# Altium PCB BRK7360.PcbDoc (part 3 of 3)
Units mil, origin at the board's own origin, x right, y up, seen from the top; angles counter-clockwise.
Board outline 7086.61 x 3956.69 mil, 4 copper layers (L1-Top, L2-Plane-1, L3-Plane-2, L4-Bottom), stack 61.722 mil thick; 4 components, 249 nets, 395 pads, 441 vias.
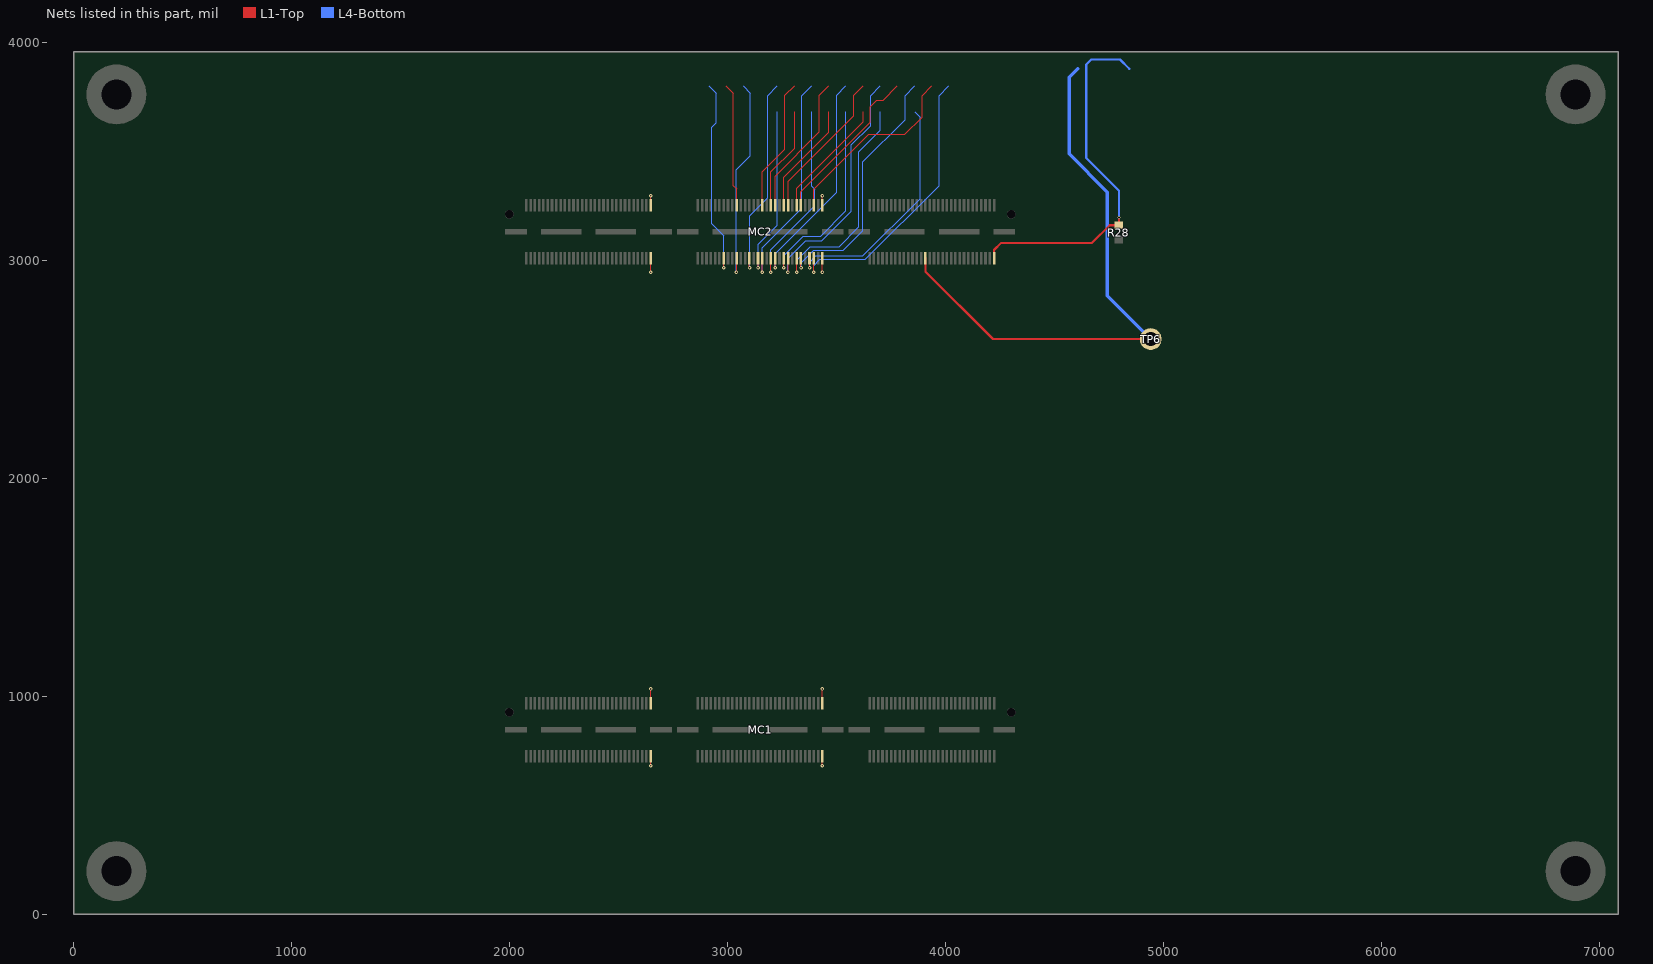
[diagram p5: the nets of this part, all layers, seen from the top]

## Via types
v1: diameter 16, hole 8, L1-Top to L4-Bottom, tented both sides, 441 vias

## Nets (pads, with @x,y where several pads share a name; then routed paths per layer and width w, separated by ;. In a path a pad name is that pad's centre, name@x,y a point inside that pad or via, vN(x,y) a via of type N, cw(c..) or ccw(c..) an arc to the next point about the centre after c; other vN are vias at no path point) (continued)
MC2_B32_P5: MC2.74 | length 923.2
  L1-Top w5: MC2.74@2982.28,3008.27 2982.28,2965.72 v1(2983,2965)
  L4-Bottom w5: 2913.39,3799.21 2948,3764.6 2948,3629 2928,3609 2928,3165.86 2983,3110.86 v1(2983,2965)
MC2_B32_P6: MC2.79 | length 568
  L1-Top w5: 2992.13,3799.21 3026,3765.34 3026,3342 3041.34,3326.66 MC2.79@3041.34,3251.58
MC2_B32_P7: MC2.80 | length 960.3
  L1-Top w5: v1(3041,2944) 3041.34,2944.34 MC2.80@3041.34,3008.27
  L4-Bottom w5: v1(3041,2944) 3041,3415 3105,3479 3105,3765.08 3070.87,3799.21
MC2_B32_P8: MC2.86 | length 930.5
  L1-Top w5: MC2.86@3100.39,3008.27 3100.39,2965.61 v1(3101,2965)
  L4-Bottom w5: v1(3101,2965) 3101,3204 3184,3287 3184,3754.87 3228.35,3799.21
MC2_B32_P9: MC2.91 | length 608.8
  L1-Top w5: MC2.91@3159.45,3251.58 3159.45,3405.45 3263,3509 3263,3755.13 3307.09,3799.21
MC2_B32_P10: MC2.92 | length 1013.6
  L1-Top w5: v1(3159,2944) 3159.45,2944.45 MC2.92@3159.45,3008.27
  L4-Bottom w5: v1(3159,2944) 3159,3056.14 3341,3238.14 3341,3754.39 3385.83,3799.21
MC2_B32_P11: MC2.97 | length 649.6
  L1-Top w5: MC2.97@3218.5,3251.58 3218.5,3385.5 3421,3588 3421,3755.65 3464.57,3799.21
MC2_B32_P12: MC2.98 | length 1012
  L1-Top w5: MC2.98@3218.5,3008.27 3218.5,2965.5 v1(3219,2965)
  L4-Bottom w5: v1(3219,2965) 3219,3030.14 3500,3311.14 3500,3755.91 3543.31,3799.21
MC2_B32_P13: MC2.103 | length 690.3
  L1-Top w5: MC2.103@3277.56,3251.58 3277.56,3362.56 3578,3663 3578,3755.17 3622.05,3799.21
MC2_B32_P14: MC2.104 | length 1138.6
  L1-Top w5: v1(3277,2944) 3277.56,2944.56 MC2.104@3277.56,3008.27
  L4-Bottom w5: v1(3277,2944) 3277,3007.14 3358.86,3089 3432.86,3089 3568,3224.14 3568,3529.14 3656,3617.14 3656,3754.43 3700.79,3799.21
MC2_B32_P15: MC2.109 | length 747.7
  L1-Top w5: MC2.109@3336.61,3251.58 3336.61,3314.61 3655.14,3633.14 3655.14,3703.14 3685,3733 3713.31,3733 3779.53,3799.21
MC2_B32_P16: MC2.110 | length 1173.2
  L1-Top w5: MC2.110@3336.61,3008.27 3336.61,2965.39 v1(3337,2965)
  L4-Bottom w5: v1(3337,2965) 3337,2988.14 3394.86,3046 3530.86,3046 3620,3135.14 3620,3450 3814,3644 3814,3754.94 3858.27,3799.21
MC2_B32_P17: MC2.115 | length 868.5
  L1-Top w5: MC2.115@3395.67,3251.58 3395.67,3324.81 3647.86,3577 3812.86,3577 3892,3656.14 3892,3754.2 3937.01,3799.21
MC2_B32_P18: MC2.116 | length 1298.6
  L1-Top w5: v1(3395,2944) 3395.67,2944.67 MC2.116@3395.67,3008.27
  L4-Bottom w5: v1(3395,2944) 3395,2974 3424,3003 3631.86,3003 3971,3342.14 3971,3754.46 4015.75,3799.21
MC2_B32_X0: MC2.108 | length 1037.7
  L1-Top w5: MC2.108@3316.93,3008.27 3316.93,2944.07 v1(3317,2944)
  L4-Bottom w5: v1(3317,2944) 3317,2999 3380,3062 3512,3062 3602,3152 3602,3497 3700.79,3595.79 3700.79,3681.1
MC2_B32_X1: MC2.107 | length 555.9
  L1-Top w5: MC2.107@3316.93,3251.58 3316.93,3329.93 3622.05,3635.05 3622.05,3681.1
MC2_B32_X2: MC2.102 | length 925
  L1-Top w5: MC2.102@3257.87,3008.27 3257.87,2965.13 v1(3258,2965)
  L4-Bottom w5: v1(3258,2965) 3258,3021 3347,3110 3428,3110 3543.31,3225.31 3543.31,3681.1
MC2_B32_X3: MC2.101 | length 515.1
  L1-Top w5: MC2.101@3257.87,3251.58 3257.87,3380.87 3464.57,3587.57 3464.57,3681.1
MC2_B32_X4: MC2.96 | length 891.3
  L1-Top w5: v1(3198,2944) 3198.82,2944.82 MC2.96@3198.82,3008.27
  L4-Bottom w5: v1(3198,2944) 3198,3048 3400,3250 3400,3324 3385.83,3338.17 3385.83,3681.1
MC2_B32_X5: MC2.95 | length 474.4
  L1-Top w5: MC2.95@3198.82,3251.58 3198.82,3404.82 3307.09,3513.09 3307.09,3681.1
MC2_B32_X6: MC2.90 | length 796.1
  L1-Top w5: MC2.90@3139.76,3008.27 3139.76,2965.24 v1(3140,2965)
  L4-Bottom w5: v1(3140,2965) 3140,3072 3228.35,3160.35 3228.35,3681.1
MC2_VREF3: MC2.114 | length 1105.6
  L1-Top w5: v1(3376,2965) MC2.114@3375.98,3008.27
  L4-Bottom w5: v1(3376,2965) 3376,2990 3405,3019 3620,3019 3883,3282 3883,3656.37 3858.27,3681.1
PRSNT_M2C: MC2.180 R28.2 | length 1681.8
  L1-Top w10: MC2.180@4222.44,3008.27 4222.44,3046.44 4255,3079 4672,3079 4753,3160 R28.2@4795,3160 4795,3194.87 v1(4795.54,3195.41)
  L4-Bottom w10: v1(4795.54,3195.41) 4795.54,3317.46 4645,3468 4645,3897 4668,3920 4800.47,3920 4842.52,3877.95
VADJ1: MC1.59 MC1.60 MC1.119 MC1.120 | length 217.7
  L1-Top w5: MC1.60@2647.64,724.8 2647.64,681.25 v1(2647.89,681) ; MC1.59@2647.64,968.11 2647.64,1032.75 v1(2647.89,1033) ; v1(3434.89,681) 3435.04,681.15 MC1.120@3435.04,724.8 ; v1(3434.89,1033) 3434.89,968.26 MC1.119@3435.04,968.11
VADJ2: MC2.59 MC2.60 | length 108
  L1-Top w5: MC2.60@2647.64,3008.27 2647.64,2944.36 v1(2648,2944) ; MC2.59@2647.64,3251.58 2647.64,3294.64 v1(2648,3295)
VADJ3: MC2.119 MC2.120 | length 107.7
  L1-Top w5: v1(3435,2944) v1(3435,2944) MC2.120@3435.04,3008.27 ; v1(3435,3295) 3435.04,3294.96 MC2.119@3435.04,3251.58
VCCBATT: MC2.148 TP6.1 | length 2633.9
  L1-Top w10: MC2.148@3907.48,3008.27 3907.48,2947.52 4217.2,2637.8 TP6.1@4940.94,2637.8
  L4-Bottom w15: 4606.3,3877.95 4566.93,3838.58 4566.93,3487.07 4742,3312 4742,2836.74 TP6.1@4940.94,2637.8
pads on no net: MC1.MH MC2.130 MC2.132 MC2.134 MC2.136 MC2.137 MC2.138 MC2.139 MC2.140 MC2.141 MC2.142 MC2.143 MC2.144 MC2.145 MC2.146 MC2.150 MC2.151 MC2.152 MC2.153 MC2.154 MC2.155 MC2.156 MC2.157 MC2.158 MC2.159 MC2.160 MC2.161 MC2.162 MC2.163 MC2.164 MC2.165 MC2.166 MC2.167 MC2.168 MC2.169 MC2.171 MC2.173 MC2.MH
copper on no net: | length 9996.8
  L1-Top w5.24: 4630.12,218.5 4630.12,225.66 cw(c4684.34,225.66) 4646,264 ccw(c4639.02,270.98) 4648.89,270.98 4648.89,337 ccw(c4611.5,337) 4637.94,363.44 4633,368.38 ; 4676,368.38 4671.06,363.44 ccw(c4697.5,337) 4660.11,337 4660.11,273.39 ccw(c4673.39,273.39) 4664,264 cw(c4625.09,225.09) 4680.12,225.09 4680.12,218.5 ; 4780.12,218.5 4780.12,225.66 cw(c4834.34,225.66) 4796,264 ccw(c4786.61,273.39) 4799.89,273.39 4799.89,336 ccw(c4760.08,336) 4788.23,364.15 4784,368.38 ; 4827,368.38 4822.77,364.15 ccw(c4850.92,336) 4811.11,336 4811.11,273.39 ccw(c4824.39,273.39) 4815,264 cw(c4778.5,227.5) 4830.12,227.5 4830.12,218.5 ; 5417.52,218.5 5417.52,226.63 cw(c5470.37,226.63) 5433,264 ccw(c5426.02,270.98) 5435.89,270.98 5435.89,333.72 ccw(c5390.58,333.72) 5422.62,365.76 5420,368.38 ; 5463,368.38 5460.38,365.76 ccw(c5492.42,333.72) 5447.11,333.72 5447.11,273.39 ccw(c5460.39,273.39) 5451,264 cw(c5411.12,224.12) 5467.52,224.12 5467.52,218.5 ; 5567,367.76 5569.62,365.14 cw(c5529.13,324.65) 5586.39,324.65 5586.39,272.18 cw(c5574.82,272.18) 5583,264 ccw(c5620.37,226.63) 5567.52,226.63 5567.52,218.5 ; 5617,367.76 5614.38,365.14 ccw(c5654.87,324.65) 5597.61,324.65 5597.61,273 ccw(c5608.74,273) 5600.87,265.13 5602,264 cw(c5564.53,226.53) 5617.52,226.53 5617.52,218.5 ; 5721.6,1236 ccw(c5721.6,1227) 5712.6,1227 cw(c5712.6,1216.37) 5720.11,1223.89 5738.43,1205.57 cw(c5667.72,1134.86) 5767.72,1134.86 5767.72,964.57 ; 5721.6,1261 cw(c5721.6,1270) 5712.6,1270 ccw(c5712.6,1280.63) 5720.11,1273.11 5738.43,1291.43 ccw(c5667.72,1362.14) 5767.72,1362.14 5767.72,1555.12 ; 6204.92,218.5 6204.92,225.18 cw(c6259.82,225.18) 6221,264 ccw(c6214.02,270.98) 6223.89,270.98 6223.89,333.72 ccw(c6178.58,333.72) 6210.62,365.76 6208,368.38 ; 6251,368.38 6248.38,365.76 ccw(c6280.42,333.72) 6235.11,333.72 6235.11,273 ccw(c6247.45,273) 6238.72,264.28 6239,264 cw(c6200.56,225.56) 6254.92,225.56 6254.92,218.5 ; 6318.62,1236 ccw(c6318.62,1227) 6309.62,1227 cw(c6309.62,1218.84) 6315.39,1224.61 6328.98,1211.02 cw(c6258.27,1140.31) 6358.27,1140.31 6358.27,964.57 ; 6318.62,1261 cw(c6318.62,1270) 6309.62,1270 ccw(c6309.62,1280.57) 6317.1,1273.1 6328.98,1284.98 ccw(c6258.27,1355.69) 6358.27,1355.69 6358.27,1555.12 ; 6354.92,218.5 6354.92,227.6 cw(c6406.4,227.6) 6370,264 6370.28,264.28 ccw(c6361.55,273) 6373.89,273 6373.89,333.72 ccw(c6328.58,333.72) 6360.62,365.76 6358,368.38 ; 6401,368.38 6398.38,365.76 ccw(c6430.42,333.72) 6385.11,333.72 6385.11,273 ccw(c6397.45,273) 6388.72,264.28 6389,264 cw(c6350.56,225.56) 6404.92,225.56 6404.92,218.5 ; 6838.58,3141.73 cw(c6838.58,3132.84) 6844.87,3139.13 6853,3131 cw(c6811.77,3089.77) 6870.08,3089.77 6870.08,3071.85 ; 6838.58,3185.04 ccw(c6838.58,3195.8) 6846.19,3188.19 6853,3195 ccw(c6811.77,3236.23) 6870.08,3236.23 6870.08,3256.89 ; 6838.62,782 cw(c6838.62,773.84) 6844.39,779.61 6852,772 cw(c6808.35,728.35) 6870.08,728.35 6870.08,709.65 ; 6838.62,825 ccw(c6838.62,835.57) 6846.1,828.1 6853,835 ccw(c6811.77,876.23) 6870.08,876.23 6870.08,904.53 ; 6839.24,1570 cw(c6839.24,1560.93) 6845.66,1567.34 6853,1560 cw(c6811.77,1518.77) 6870.08,1518.77 6870.08,1497.05 ; 6839.24,1613 ccw(c6839.24,1622.07) 6845.66,1615.66 6852,1622 ccw(c6808.35,1665.65) 6870.08,1665.65 6870.08,1691.93 ; 6839.24,2358 cw(c6839.24,2348.93) 6845.66,2355.34 6852,2349 cw(c6808.35,2305.35) 6870.08,2305.35 6870.08,2284.45 ; 6839.24,2401 ccw(c6839.24,2410.07) 6845.66,2403.66 6853,2411 ccw(c6811.77,2452.23) 6870.08,2452.23 6870.08,2479.33
  L1-Top w8: v1(469,593) 469.91,593.91 516,593.91 ; v1(516,556) 516,593.91 ; v1(563,594) 562.91,593.91 516,593.91 ; v1(2203,1194) 2203,1227.38 ; v1(2255,1194) 2255,1227.38 ; v1(2359,1194) 2359,1227.38 ; v1(2411,1194) 2411,1227.38 ; v1(2463,1194) 2463,1227.38 ; v1(2992,1194) 2992,1227.38 ; v1(3044,1194) 3044,1227.38 ; v1(3148,1194) 3148,1227.38 ; v1(3200,1194) 3200,1227.38 ; v1(3252,1194) 3252,1227.38 ; 4842.52,3283.46 4901.57,3283.46 4901.57,3251.43 4935.63,3217.37 4935.63,3133.86 ; 4917.28,2125.62 4917.61,2125.95 5065.25,2125.95 ; 4960.63,3283.46 5019.68,3283.46 5019.69,3252.69 4985.63,3218.63 4985.63,3133.86 ; 5035.63,3133.86 5035.63,3202.63 5078.74,3245.74 5078.74,3283.46 5137.8,3283.46 ; v1(5538,2455) 5538.19,2454.81 5538.19,2401.57 ; 5569.69,2401.57 5569.69,2454.69 v1(5570,2455) ; v1(6286,2454) 6286.22,2453.78 6286.22,2401.57 ; 6317.72,2401.57 6317.72,2453.72 v1(6318,2454)
  L1-Top w10: v1(2307,1194) 2307,1227.38 ; v1(2515,1194) 2515,1227.38 ; v1(3096,1194) 3096,1227.38 ; v1(3304,1194) 3304,1227.38 ; 4015.75,275.59 4133.86,393.7 4133.86,452.76 ; v1(4580,279) 4580.12,278.88 4580.12,218.5 ; v1(4730,279) 4730.12,278.88 4730.12,218.5 ; v1(4804,2090) 4820.38,2090 4832,2078.38 ; v1(4804,2114) 4820.38,2114 4832,2125.62 4917.28,2125.62 ; 4842.52,3330.71 4842.52,3362.52 v1(4843,3363) ; 4880.12,218.5 4880.12,278.12 v1(4881,279) ; 4960.63,3330.71 4960.63,3362.63 v1(4961,3363) ; 4985.63,2929.13 4986,2928.76 v1(4986,2871) ; 5035.63,2929.13 5037.39,2927.38 5122,2927.38 5140.38,2927.38 v1(5151,2938) ; 5065.25,2325.95 5108.95,2325.95 v1(5109,2326) ; 5078.74,3330.71 5078.74,3362.74 v1(5079,3363) ; v1(5367,279) 5367.52,278.48 5367.52,218.5 ; v1(5396,2777) 5396.46,2776.54 5396.46,2724.41 ; v1(5412,2455) 5412.2,2454.8 5412.2,2401.57 ; 5427.95,2724.41 5427.95,2776.95 v1(5428,2777) ; 5506.69,2401.57 5506.69,2454.69 v1(5507,2455) ; v1(5517,279) 5517.52,278.48 5517.52,218.5 ; v1(5601,2455) 5601.18,2454.82 5601.18,2401.57 ; 5667.52,218.5 5667.52,278.52 v1(5668,279) ; 5679.92,2724.41 5679.92,2776.92 v1(5680,2777) ; 5695.67,2401.57 5695.67,2454.67 v1(5696,2455) ; v1(6144,2777) 6144.49,2776.51 6144.49,2724.41 ; 6154.92,218.5 6154.92,278.92 v1(6155,279) ; v1(6160,2454) 6160.24,2453.76 6160.24,2401.57 ; 6175.98,2724.41 v1(6176,2777) ; 6254.72,2401.57 6254.72,2453.72 v1(6255,2454) ; 6304.92,218.5 6304.92,278.92 v1(6305,279) ; v1(6349,2454) 6349.21,2453.79 6349.21,2401.57 ; 6427.95,2724.41 6427.95,2776.95 v1(6428,2777) ; 6443.7,2401.57 6443.7,2453.7 v1(6444,2454) ; 6454.92,218.5 6454.92,277.92 v1(6456,279) ; v1(6778,650) 6778.39,649.61 6812.01,649.61 ; v1(6778,964) 6778.57,964.57 6812.01,964.57 ; v1(6778,2224) 6778.41,2224.41 6812.01,2224.41 ; v1(6778,2539) 6778.37,2539.37 6812.01,2539.37 ; v1(6778,3012) 6778.19,3011.81 6812.01,3011.81 ; v1(6778,3317) 6811.94,3317 6812,3316.94 ; v1(6778,1437) 6812.01,1437.01 ; v1@6778.03,1751.97 6812.01,1751.97 ; v1(6811,907) 6812.01,908.01 6812.01,964.57 ; v1(6811,1022) 6812.01,1020.99 6812.01,964.57 ; v1(6811,1380) 6812.01,1381.01 6812.01,1437.01 ; v1(6811,1695) 6812.01,1696.01 6812.01,1751.97 ; v1(6812,3260) 6812,3316.94 ; v1(6812,3374) 6812,3316.94 ; v1(6812,592) 6812.01,649.61 ; v1(6812,1494) 6812.01,1437.01 ; v1(6812,2167) 6812.01,2224.41 ; v1(6812,2282) 6812.01,2224.41 ; v1(6812,2482) 6812.01,2539.37 ; v1(6812,2597) 6812.01,2539.37 ; v1(6812,2954) 6812.01,3011.81 ; v1(6812,3069) 6812.01,3011.81 ; v1(6813,706) 6812.01,705.01 6812.01,649.61 ; v1(6813,1809) 6812.01,1808.01 6812.01,1751.97 ; v1(6927,2954) 6928.15,2955.15 6928.15,3011.81 ; v1(6928,592) 6928.15,592.15 6928.15,649.61 ; v1(6928,907) 6928.15,907.15 6928.15,964.57 ; v1(6928,1022) 6928.15,1021.85 6928.15,964.57 ; v1(6928,1380) 6928.15,1380.15 6928.15,1437.01 ; v1(6928,1809) 6928.15,1808.85 6928.15,1751.97 ; v1(6929,707) 6928.15,706.15 6928.15,649.61 ; v1(6929,1494) 6928.15,1493.15 6928.15,1437.01 ; v1(6929,1695) 6928.15,1695.85 6928.15,1751.97 ; v1(6929,2167) 6928.15,2167.85 6928.15,2224.41 ; v1(6929,2282) 6928.15,2281.15 6928.15,2224.41 ; v1(6929,2482) 6928.15,2482.85 6928.15,2539.37 ; v1(6929,2597) 6928.15,2596.15 6928.15,2539.37 ; v1(6929,3260) 6929,3316.08 6928.15,3316.93 6929,3317.78 v1(6929,3374) ; v1(6930,3069) 6928.15,3067.15 6928.15,3011.81 ; v1(6962,650) 6961.61,649.61 6928.15,649.61 ; v1(6962,964) 6961.43,964.57 6928.15,964.57 ; v1(6962,1437) 6928.15,1437.01 ; v1@6961.97,1751.97 6928.15,1751.97 ; v1(6962,2224) 6961.59,2224.41 6928.15,2224.41 ; v1(6962,2539) 6961.63,2539.37 6928.15,2539.37 ; v1(6962,3012) 6961.81,3011.81 6928.15,3011.81
  L1-Top w12: v1(4885,3192) 4885.63,3191.37 4885.63,3133.86 ; 4901.57,3330.71 4901.57,3362.57 v1(4902,3363) ; 5019.69,3330.71 5019.69,3362.69 v1(5020,3363) ; 5122,2974.62 5140.38,2974.62 v1(5151,2964) ; 5137.8,3330.71 5137.8,3362.8 v1(5138,3363)
  other v1: 6778,1752 6962,1752

## Polygon pours and split planes (outlines as drawn)
DGND on L2-Plane-1 (split plane): 7066.52,20.1 20.1,20.1 20.1,3936.6 7066.52,3936.6
+1.8VDD on L3-Plane-2 (split plane): 4719.44,3666.13 4405.65,3352.35 4404.45,3350.78 4403.69,3348.96 4403.44,3347 4403.44,3117.13 4218.87,2932.56 4190.56,2932.56 4190.56,2999 4190.31,3000.96 4189.55,3002.78 4188.35,3004.35 4155.35,3037.35 4153.78,3038.55 4151.96,3039.31 4150,3039.56 3957.13,3039.56 3736.35,3260.35 3723.56,3273.13 3723.56,3302.87 3750.13,3329.44 4283,3329.44 4284.96,3329.69 4286.78,3330.45 4288.35,3331.65 4573.35,3616.65 4574.55,3618.22 4575.31,3620.04 4575.56,3622 4575.56,3829.44 4719.44,3829.44
VADJ3 on L3-Plane-2 (split plane): 4045.44,3675 4045.44,3650.13 3811.87,3416.56 3608,3416.56 3606.04,3416.31 3604.22,3415.55 3602.65,3414.35 3471.15,3282.85 3469.95,3281.28 3469.19,3279.46 3468.94,3277.5 3468.94,2928.56 3417.56,2928.56 3417.56,3319.87 3420.7,3323 3420.7,3323.01 3430.26,3332.56 3640.13,3542.44 3800,3542.44 3801.96,3542.69 3803.78,3543.45 3805.35,3544.65 3902.35,3641.65 3903.55,3643.22 3904.31,3645.04 3904.34,3645.27 3904.56,3647 3904.56,3712.44 4045.44,3712.44
VADJ1 on L3-Plane-2 (split plane): 3504.25,1000.8 3504.25,763.78 3504.5,761.82 3505.26,760 3506.46,758.43 3746.62,518.27 3939.24,325.65 3940.81,324.45 3942.63,323.69 3944.59,323.44 4048.44,323.44 4048.44,244.56 3907.56,244.56 3907.56,292 3907.31,293.96 3906.55,295.78 3905.35,297.35 3866.64,336.06 3865.07,337.26 3864.32,337.57 3863.25,338.02 3861.29,338.27 2381.23,338.27 2379.27,338.02 2377.44,337.26 2375.88,336.06 2297.8,257.98 2279.38,239.56 2135.56,239.56 2135.56,321.72 2318.09,504.25 2484.25,504.25 2486.21,504.5 2487.28,504.95 2488.03,505.26 2489.6,506.46 2623.46,640.32 2624.66,641.89 2625.42,643.71 2625.68,645.67 2625.67,645.67 2625.67,674.98 2670.7,720 2670.7,720.01 2671.91,721.57 2672.66,723.4 2672.92,725.35 2672.92,995.64 2672.92,995.65 2672.66,997.6 2672.22,998.67 2671.91,999.43 2670.7,1000.99 2670.7,1001 2640.56,1031.13 2640.56,1039.68 2674.03,1039.68 2716.84,996.87 2716.84,775.59 2717.1,773.63 2717.86,771.81 2719.06,770.24 2856.86,632.45 2858.42,631.24 2860.25,630.49 2862.2,630.23 2862.21,630.23 3358.79,630.23 3358.8,630.23 3360.75,630.49 3361.82,630.93 3362.58,631.24 3364.14,632.45 3458.1,726.41 3458.11,726.41 3459.31,727.97 3459.62,728.73 3460.06,729.8 3460.32,731.76 3460.32,992.79 3460.06,994.75 3459.31,996.57 3458.11,998.14 3458.1,998.14 3424.56,1031.68 3424.56,1043.62 3461.43,1043.62
+3.3VDD on L3-Plane-2 (split plane): 4560.44,3625.13 4279.87,3344.56 3747,3344.56 3745.04,3344.31 3743.22,3343.55 3741.65,3342.35 3710.65,3311.35 3709.45,3309.78 3708.69,3307.96 3708.44,3306 3708.44,3270 3708.69,3268.04 3709.45,3266.22 3710.65,3264.65 3725.65,3249.65 3948.65,3026.65 3950.22,3025.45 3952.04,3024.69 3954,3024.44 4146.87,3024.44 4175.44,2995.87 4175.44,2925 4175.69,2923.04 4176.45,2921.22 4177.65,2919.65 4179.22,2918.45 4181.04,2917.69 4183,2917.44 4222,2917.44 4223.96,2917.69 4225.78,2918.45 4227.35,2919.65 4414.13,3106.44 4644,3106.44 4645.96,3106.69 4647.78,3107.45 4649.35,3108.65 4742.35,3201.65 4743.55,3203.22 4744.31,3205.04 4744.56,3207 4744.56,3303.87 4854.13,3413.44 6102.87,3413.44 6476.44,3039.87 6476.44,2584.13 6333.87,2441.56 6262.13,2441.56 6217.35,2486.35 6215.78,2487.55 6213.96,2488.31 6212,2488.56 5627,2488.56 5625.04,2488.31 5623.22,2487.55 5621.65,2486.35 5578.87,2443.56 5525.13,2443.56 5480.35,2488.35 5478.78,2489.55 5476.96,2490.31 5475,2490.56 5411,2490.56 5409.04,2490.31 5407.22,2489.55 5405.65,2488.35 5017.87,2100.56 4788.56,2100.56 4788.56,2141.44 4947,2141.44 4948.96,2141.69 4950.78,2142.45 4952.35,2143.65 4989.35,2180.65 4990.55,2182.22 4991.31,2184.04 4991.56,2186 4991.56,2373 4991.31,2374.96 4990.55,2376.78 4989.35,2378.35 4941.35,2426.35 4939.78,2427.55 4937.96,2428.31 4936,2428.56 4582,2428.56 4580.04,2428.31 4578.22,2427.55 4576.65,2426.35 3300.87,1150.56 1066.13,1150.56 318.56,1898.13 318.56,2074.87 599.13,2355.44 2852,2355.44 2853.96,2355.69 2855.78,2356.45 2857.35,2357.65 3413.13,2913.44 3476.5,2913.44 3478.46,2913.69 3480.28,2914.45 3481.85,2915.65 3483.05,2917.22 3483.81,2919.04 3484.06,2921 3484.06,3274.37 3611.13,3401.44 3815,3401.44 3816.96,3401.69 3818.78,3402.45 3820.35,3403.65 4056.13,3639.44 4091,3639.44 4092.96,3639.69 4094.78,3640.45 4096.35,3641.65 4284.13,3829.44 4560.44,3829.44
VADJ2 on L3-Plane-2 (split plane): 2419.65,3551.65 2421.22,3550.45 2423.04,3549.69 2425,3549.44 2632.87,3549.44 2681.44,3500.87 2681.44,3297 2681.44,2934 2681.44,2929.56 2638.56,2929.56 2638.56,2947 2638.56,3269 2638.56,3313 2638.31,3314.96 2637.55,3316.78 2636.35,3318.35 2490.35,3464.35 2488.78,3465.55 2486.96,3466.31 2485,3466.56 2333.13,3466.56 2135.56,3664.13 2135.56,3714.44 2256.87,3714.44
DGND on L3-Plane-2 (split plane): 7066.52,20.1 20.1,20.1 20.1,3936.6 7066.52,3936.6

## Keep-outs
Keep-Out Layer:
  the board outline again, w7.01

## Other copper
L1-Top:
  region net +5VDC: 481,1023 372,1132 372,1258 1339,2225 2894,2225 3642,2973 3727,2973 3727,2508 3014,1795 1746,1795 633,682 481,682
L4-Bottom:
  region net +5VDC: 3638,2929 3638,2970 4160,3492 4160,3846 4227,3913 4540,3913 4560,3893 4560,3864 4538,3842 4263,3842 4240,3819 4240,3475 3694,2929
L3-Plane-2 (plane layer: these items are gaps in the copper):
  lines w15: 3410,2921 2852,2363 596,2363 311,2078 311,1895 1063,1143 3304,1143 4582,2421 4936,2421 4984,2373 4984,2186 4947,2149 4781,2149 4781,2093 5021,2093 5411,2483 5475,2483 5522,2436 5582,2436 5627,2481 6212,2481 6259,2434 6337,2434 6484,2581 6484,3043 6106,3421 4987,3421 4851,3421 4737,3307 4737,3207 4644,3114 4411,3114 ; 3410,2921 3410,3323 3415.35,3328.35 3424.91,3337.91 3637,3550 3800,3550 3897,3647 3897,3720 4010,3720 4053,3720 4053,3675 4053,3647 ; 3410,2921 3429,2921 3476.5,2921 3476.5,3277.5 3608,3409 3815,3409 4053,3647 ; 4053,3647 4091,3647 4281,3837 4568,3837 ; 4411,3114 4411,3347 4727,3663 4727,3837 4568,3837 ; 4411,3114 4222,2925 4183,2925 4183,2999 4150,3032 4086,3032 3954,3032 3731,3255 3716,3270 3716,3306 3747,3337 4283,3337 4568,3622 4568,3837 ; 2128,232 2282.52,232 2303.15,252.63 2381.23,330.71 3861.29,330.71 3900,292 3900,237 4056,237 4056,331 3944.59,331 3751.97,523.62 3511.81,763.78 3511.81,1003.94 3464.57,1051.18 3417,1051.18 3417,1028.55 3452.76,992.79 3452.76,731.76 3358.8,637.8 2862.2,637.8 2724.41,775.59 2724.41,1000 2677.17,1047.24 2633,1047.24 2633,1028 2665.35,995.65 2665.35,725.35 2618.11,678.11 2618.11,645.67 2484.25,511.81 2314.96,511.81 2128,324.85 2128,232 ; 2128,3661 2128,3722 2260,3722 2425,3557 2636,3557 2689,3504 2689,3297 2689,2934 2689,2922 2631,2922 2631,2947 2631,3269 2631,3313 2485,3459 2330,3459 2128,3661

## Silkscreen, mask and mechanical layers (free items; w line width, h text height)
Top Overlay:
  lines w10: 787.4,1397.64 787.4,610.24 1574.8,610.24 ; 787.4,2578.74 787.4,3366.14 1574.8,3366.14 ; 3937.01,610.24 4724.41,610.24 4724.41,1397.64 ; 3937.01,3366.14 4724.41,3366.14 4724.41,2578.74
  lines w20: 5472.44,925.2 5472.44,748.03 4960.63,748.03 4960.63,1771.65 5472.44,1771.65 5472.44,1614.17 ; 6643.7,974.41 6643.7,749.61 5551.18,749.61 5551.18,1773.23 6643.7,1773.23 6643.7,1555.12 ; 6742.13,915.35 6742.13,531.5 7047.24,531.5 7047.24,1870.08 6742.13,1870.08 6742.13,1496.06 ; 6742.13,2500 6742.13,2106.3 7047.24,2106.3 7047.24,3444.88 6742.13,3444.88 6742.13,3051.18
  text "20" at 2299.21,3669.29 h30
  text "1" at 2448.82,3669.29 h30
  text "20" at 4070.87,3669.29 h30
  text "1" at 677.17,3661.42 h30
  text "XILINX JTAG" at 486,3271 h50 r270
  text "TDI" at 86.43,3070.87 h50
  text "TDO" at 66.74,2992.13 h50
  text "TCK" at 66.74,2913.39 h50
  text "TMS" at 66.74,2834.65 h50
  text "VREF" at 27.37,2755.91 h50
  text "GTX_115 CH1" at 6761.81,2529.53 h50 r90
  text "GTX_115 CH3" at 5344.49,2214.57 h50
  text "GTX_115 CH2" at 6092.52,2214.57 h50
  text "CLK0P" at 5413.39,1456.69 h50 r90
  text "20151022" at 61.35,1435.83 h40 r270
  text "BRK7360" at 140.09,1435.83 h40 r270
  text "GTX_116 CH0" at 6673.23,1003.94 h50 r90
  text "MGTREFCLK_116" at 5492.13,964.57 h50 r90
  text "GTX_115 CH0" at 6761.81,944.88 h50 r90
  text "CLK0N" at 5413.39,846.46 h50 r90
  text "GTX_116 / CH3" at 4862.2,314.96 h50
  text "GTX_116 / CH2" at 5649.61,314.96 h50
  text "GTX_116 / CH1" at 6437.01,314.96 h50
  text "20" at 2299.21,263.78 h30
  text "20" at 4070.87,263.78 h30
  text "1" at 677.17,255.91 h30
  text "1" at 2448.82,255.91 h30
Outline:
  the board outline again, w8
Mechanical:
  lines w10: 787.4,610.24 4724.41,610.24 4724.41,3366.14 787.4,3366.14 787.4,610.24
Fab Notes:
  drawing of 451 lines, arcs and shapes, not listed
  text "NOTES" at -110.02,7259.92 h50
  text "1. MATERIAL SELECTION:" at -112.24,7159.92 h50
  text "4-LAYER, 370HR, 0.062\" +/- 0.005 THICK" at 14.98,7084.92 h50
  text "SURFACE FINISH: ENIG (ELECTROLESS NICKEL, IMMERSION GOLD)" at 14.98,7009.92 h50
  text "2. SOLDER RESIST: GREEN LPI" at -112.24,6884.92 h50
  text "3. SILKSCREEN: WHITE / DO NOT REMOVE OVER TENTED VIAS." at -112.24,6759.92 h50
  text "4. LOT CODE IDENTIFICATION: ADD TO SILKSCREEN" at -112.24,6634.92 h50
  text "5. DRILL SIZES ARE FINISHED SIZE AFTER PLATING." at -112.24,6509.92 h50
  text "6. ELECTRICAL BARE BOARD TEST REQUIRED" at -112.24,6384.92 h50
  text "7. FABRICATE TO MEET EU ROHS DIRECTIVE" at -112.24,6259.92 h50
  text "8. BOARD TO BE IMPEDANCE CONTROLLED:" at -112.24,6138.12 h50
  text "REFER TO STACKUP AND IMPEDANCE CHARTS. / LAYER DIALECTRIC THICKNESS AND TRACE WIDTHS FOR REFERENCE ONLY. / VENDOR MAY ADJUST AS NEEDED TO MEET IMPEDANCE CHARTS WITHIN +/-5% / OVERALL THICKNESS SHALL REMAIN AS SPECIFIED IN STACKUP." at 12.84,5821.32 h50
  text "9. PANELIZATION:" at -112.24,5716.26 h50
  text "2-PIECES PER PANEL" at 14.98,5641.26 h50
  text "0.25-IN RAILS ON ALL SIDES" at 14.98,5565.58 h50
  text "0.25-IN TAB ROUTING WITH MOUSE-BITES FOR BOARD SEPARATION" at 14.98,5490.58 h50
  text "MOUSE BITE LOCATIONS INDICATED BY :::" at 14.98,5406.83 h50
  text "CONTROLLED IMPEDANCE CHART / Layer  SE/DIFF  Zo (Ohms)    Ref Layer  Trace (mils)  Space (mils) / -----  -------  -----------  ---------  ------------  ------------ / 1      DIFF     100          2          5.24          5.98 / 4      DIFF     100          3          5.24          5.98" at -73.6,4515.7 h100
  text ":::" at 2338.21,4002.37 h50
  text ":::" at 5096,4001 h50
  text "Layer" at 7654.59,3768.7 h60
  text "Name" at 8064.5,3768.7 h60
  text "Material" at 8994.24,3768.7 h60
  text "Thickness" at 9854.01,3768.7 h60
  text "Constant" at 10503.85,3768.7 h60
  text "Board Layer Stack" at 11073.71,3768.7 h60
  text "1" at 7654.59,3648.7 h60
  text "Top Overlay" at 8064.5,3648.7 h60
  text "2" at 7654.59,3528.7 h60
  text "Top Solder" at 8064.5,3528.7 h60
  text "Solder Resist" at 8994.24,3528.7 h60
  text "0.40mil" at 9854.01,3528.7 h60
  text "3.5" at 10503.85,3528.7 h60
  text "3" at 7654.59,3408.7 h60
  text "L1-Top" at 8064.5,3408.7 h60
  text "Copper" at 8994.24,3408.7 h60
  text "1.95mil" at 9854.01,3408.7 h60
  text "4" at 7654.59,3288.7 h60
  text "Dielectric1" at 8064.5,3288.7 h60
  text "FR-4" at 8994.24,3288.7 h60
  text "2.27mil" at 9854.01,3288.7 h60
  text "4.2" at 10503.85,3288.7 h60
  text "5" at 7654.59,3168.7 h60
  text "Dielectric 5" at 8064.5,3168.7 h60
  text "FR-4" at 8994.24,3168.7 h60
  text "2.27mil" at 9854.01,3168.7 h60
  text "4.2" at 10503.85,3168.7 h60
  text "6" at 7654.59,3048.7 h60
  text "L2-Plane-1" at 8064.5,3048.7 h60
  text "Copper" at 8994.24,3048.7 h60
  text "1.30mil" at 9854.01,3048.7 h60
  text "7" at 7654.59,2928.7 h60
  text "Dielectric 4" at 8064.5,2928.7 h60
  text "14.00mil" at 9854.01,2928.7 h60
  text "4.2" at 10503.85,2928.7 h60
  text "8" at 7654.59,2808.7 h60
  text "Dielectric 6" at 8064.5,2808.7 h60
  text "6.05mil" at 9854.01,2808.7 h60
  text "4.2" at 10503.85,2808.7 h60
  text "9" at 7654.59,2688.7 h60
  text "Dielectric 7" at 8064.5,2688.7 h60
  text "6.05mil" at 9854.01,2688.7 h60
  text "4.2" at 10503.85,2688.7 h60
  text "10" at 7654.59,2568.7 h60
  text "Dielectric 8" at 8064.5,2568.7 h60
  text "6.05mil" at 9854.01,2568.7 h60
  text "4.2" at 10503.85,2568.7 h60
  text "11" at 7654.59,2448.7 h60
  text "Dielectric 9" at 8064.5,2448.7 h60
  text "14.00mil" at 9854.01,2448.7 h60
  text "4.2" at 10503.85,2448.7 h60
  text "12" at 7654.59,2328.7 h60
  text "L3-Plane-2" at 8064.5,2328.7 h60
  text "Copper" at 8994.24,2328.7 h60
  text "1.30mil" at 9854.01,2328.7 h60
  text "13" at 7654.59,2208.7 h60
  text "Dielectric3" at 8064.5,2208.7 h60
  text "FR-4" at 8994.24,2208.7 h60
  text "2.27mil" at 9854.01,2208.7 h60
  text "4.2" at 10503.85,2208.7 h60
  text "14" at 7654.59,2088.7 h60
  text "Dielectric 10" at 8064.5,2088.7 h60
  text "FR-4" at 8994.24,2088.7 h60
  text "2.27mil" at 9854.01,2088.7 h60
  text "4.2" at 10503.85,2088.7 h60
  text ":::" at 7133.37,2028.79 h50 r270
  text ":::" at -49.37,2022.21 h50 r90
  text "15" at 7654.59,1968.7 h60
  text "L4-Bottom" at 8064.5,1968.7 h60
  text "Copper" at 8994.24,1968.7 h60
  text "1.95mil" at 9854.01,1968.7 h60
  text "16" at 7654.59,1848.7 h60
  text "Bottom Solder" at 8064.5,1848.7 h60
  text "Solder Resist" at 8994.24,1848.7 h60
  text "0.40mil" at 9854.01,1848.7 h60
  text "3.5" at 10503.85,1848.7 h60
  text "17" at 7654.59,1728.7 h60
  text "Bottom Overlay" at 8064.5,1728.7 h60
  text ":::" at 5155,-47 h50 r180
  text ":::" at 2327.21,-75.63 h50
Drill Drawing:
  circle w10: c5331.77,5246.43 r20
  circle w10: c5331.77,5246.43 r33.33
  lines w15: 5238.64,4718.1 12154.78,4718.1 ; 5238.64,5318.1 12154.78,5318.1 ; 5789.52,4568.1 5789.52,5468.1 ; 6389.36,4568.1 6389.36,5468.1 ; 7539.02,4568.1 7539.02,5468.1 ; 8044.9,4568.1 8044.9,5468.1 ; 8778.7,4568.1 8778.7,5468.1 ; 9968.35,4568.1 9968.35,5468.1 ; 10558.2,4568.1 10558.2,5468.1 ; 11304,4568.1 11304,5468.1 ; 5238.64,4568.1 12154.78,4568.1 12154.78,5468.1 5238.64,5468.1 5238.64,4568.1
  text "Symbol" at 5328.64,5363.1 h72
  text "Count" at 5834.52,5363.1 h72
  text "Hole Size" at 6434.36,5363.1 h72
  text "Plated" at 7584.02,5363.1 h72
  text "Hole Type" at 8089.9,5363.1 h72
  text "Drill Layer Pair" at 8823.7,5363.1 h72
  text "Via/Pad" at 10013.35,5363.1 h72
  text "Pad Shape" at 10603.2,5363.1 h72
  text "Technology" at 11349,5363.1 h72
  text "1" at 5834.52,5213.1 h60
  text "65.00mil (1.651mm)" at 6434.36,5213.1 h60
  text "PTH" at 7584.02,5213.1 h60
  text "Round" at 8089.9,5213.1 h60
  text "L1-Top - L4-Bottom" at 8823.7,5213.1 h60
  text "Pad" at 10013.35,5213.1 h60
  text "Rounded" at 10603.2,5213.1 h60
  text "c254h165" at 11349,5213.1 h60
  text "4" at 5834.52,5063.1 h60
  text "40.16mil (1.020mm)" at 6434.36,5063.1 h60
  text "NPTH" at 7584.02,5063.1 h60
  text "Round" at 8089.9,5063.1 h60
  text "L1-Top - L4-Bottom" at 8823.7,5063.1 h60
  text "Pad" at 10013.35,5063.1 h60
  text "Rounded" at 10603.2,5063.1 h60
  text "c102hn102" at 11349,5063.1 h60
  text "F" at 5299.55,5053.11 h66.67
  text "4" at 5834.52,4913.1 h60
  text "137.80mil (3.500mm)" at 6434.36,4913.1 h60
  text "PTH" at 7584.02,4913.1 h60
  text "Round" at 8089.9,4913.1 h60
  text "L1-Top - L4-Bottom" at 8823.7,4913.1 h60
  text "Pad" at 10013.35,4913.1 h60
  text "Rounded" at 10603.2,4913.1 h60
  text "c700h350" at 11349,4913.1 h60
  text "A" at 5299.55,4903.11 h66.67
  text "441" at 5834.52,4763.1 h60
  text "8.00mil (0.203mm)" at 6434.36,4763.1 h60
  text "PTH" at 7584.02,4763.1 h60
  text "Round" at 8089.9,4763.1 h60
  text "L1-Top - L4-Bottom" at 8823.7,4763.1 h60
  text "Via" at 10013.35,4763.1 h60
  text "Rounded" at 10603.2,4763.1 h60
  text "v41h20m0mx0" at 11349,4763.1 h60
  text "M" at 5299.55,4753.11 h66.67
  text "450 Total" at 5834.52,4613.1 h60
  text ":::" at 2332.68,3986.22 h50
  text ":::" at 5078.74,3986.22 h50
  text ":::" at -29.53,1948.82 h50 r90
  text ":::" at 7155.51,1948.82 h50 r90
  text ":::" at 2332.68,-59.06 h50
  text ":::" at 5078.74,-59.06 h50
Doc-Assy-Top:
  lines w4.1: -945.75,-126.53 -781.77,-126.53 ; -945.75,1615.7 -781.77,1615.7 ; -945.75,3357.92 -781.77,3357.92 ; 1144.92,-1704.77 1144.92,-1540.8 ; 1144.92,4772.19 1144.92,4936.17 ; 3399.56,-1704.77 3399.56,-1540.8 ; 3399.56,4772.19 3399.56,4936.17 ; 4055.46,-1704.77 7744.87,-1704.77 ; 5123.87,-1540.8 5123.87,-1051.46 ; 5123.87,-1345.84 7580.89,-1345.84 ; 5654.2,-1704.77 5654.2,-1540.8 ; 5654.2,4772.19 5654.2,4936.17 ; 6184.94,-1148.3 6184.94,-761.2 ; 6817.59,-1345.84 6817.59,-1148.54 ; 7580.89,-1148.54 5123.87,-1148.54 5123.87,-761.2 7580.89,-761.2 ; 7580.89,-126.53 7744.87,-126.53 ; 7580.89,1615.7 7744.87,1615.7 ; 7580.89,3357.92 7744.87,3357.92 ; 7744.87,-1704.77 7744.87,4936.17 -945.75,4936.17 -945.75,-1704.77 7744.87,-1704.77 ; -781.77,-1540.8 -781.77,4772.19 7580.89,4772.19 7580.89,-1540.8 -781.77,-1540.8
  text "1" at -1.8,4828.07 h57.39
  text "2" at 2253.38,4828.07 h57.39
  text "3" at 4503.92,4828.07 h57.39
  text "4" at 6759.39,4828.07 h57.39
  text "A" at -886.84,4154.83 h57.39
  text "A" at 7644.96,4154.83 h57.39
  text "B" at -886.84,2412.61 h57.39
  text "B" at 7644.96,2412.61 h57.39
  text "C" at -886.84,670.39 h57.39
  text "C" at 7644.96,670.39 h57.39
  text "TITLE:" at 5187.54,-825.76 h36.89
  text "Opal Kelly" at 6249.5,-851.58 h57.39
  text "13500 SW 72nd Ave Suite 100" at 6249.5,-948.42 h57.39
  text "Portland, OR 97223" at 6249.5,-1029.11 h57.39
  text "BRK7360 / Assembly Drawing" at 5214.08,-1030.49 h57.39
  text "D" at -886.84,-1067.74 h57.39
  text "D" at 7644.96,-1067.74 h57.39
  text "www.opalkelly.com" at 6249.5,-1109.81 h57.39
  text "(Top)" at 5214.08,-1123.96 h57.39
  text "DATE:" at 5187.54,-1213.1 h36.89
  text "TIME:" at 5855.62,-1214.14 h36.89
  text "SIZE:" at 6895.06,-1214.14 h36.89
  text ".PRINT_DATE" at 5218.77,-1312.53 h57.39
  text ".Print_Time" at 5896.61,-1312.53 h57.39
  text "ANSI A" at 6933.8,-1312.53 h57.39
  text "FILE NAME:" at 5187.54,-1406.77 h36.89
  text ".PCB_FILE_NAME" at 5219.82,-1503.6 h57.39
  text "1" at -1.8,-1654.06 h57.39
  text "2" at 2253.38,-1654.06 h57.39
  text "3" at 4503.92,-1654.06 h57.39
  text "4" at 6759.39,-1654.06 h57.39
Doc-Assy-Bot:
  lines w4.1: -945.66,-125.02 -781.78,-125.02 ; -945.66,1616.29 -781.78,1616.29 ; -945.66,3357.61 -781.78,3357.61 ; -781.78,-1343.71 1673.97,-1343.71 ; -781.78,-1146.51 1673.97,-1146.51 1673.97,-759.37 -781.78,-759.37 ; -18.87,-1343.71 -18.87,-1146.51 ; 613.45,-1146.26 613.45,-759.37 ; 1143.92,-1702.45 1143.92,-1538.57 ; 1143.92,4771.15 1143.92,4935.04 ; 1673.97,-1538.57 1673.97,-1049.48 ; 2741.83,-1702.45 -945.66,-1702.45 ; 3397.39,-1702.45 3397.39,-1538.57 ; 3397.39,4771.15 3397.39,4935.04 ; 5650.86,-1702.45 5650.86,-1538.57 ; 5650.86,4771.15 5650.86,4935.04 ; 7576.55,-125.02 7740.44,-125.02 ; 7576.55,1616.29 7740.44,1616.29 ; 7576.55,3357.61 7740.44,3357.61 ; -945.66,-1702.45 -945.66,4935.04 7740.44,4935.04 7740.44,-1702.45 -945.66,-1702.45 ; -781.78,-1538.57 -781.78,4771.15 7576.55,4771.15 7576.55,-1538.57 -781.78,-1538.57
  text "4" at 39.3,4827 h57.36
  text "3" at 2293.6,4827 h57.36
  text "2" at 4542.97,4827 h57.36
  text "1" at 6796.98,4827 h57.36
  text "A" at -845.81,4154.11 h57.36
  text "A" at 7681.56,4154.11 h57.36
  text "B" at -845.81,2412.79 h57.36
  text "B" at 7681.56,2412.79 h57.36
  text "C" at -845.81,671.47 h57.36
  text "C" at 7681.56,671.47 h57.36
  text "TITLE:" at 1610.34,-823.89 h36.87
  text "Opal Kelly" at 548.93,-849.7 h57.36
  text "13500 SW 72nd Ave Suite 100" at 548.93,-946.49 h57.36
  text "Portland, OR 97223" at 548.93,-1027.14 h57.36
  text "BRK7360 / Assembly Drawing" at 1583.81,-1028.52 h57.36
  text "D" at -845.81,-1065.75 h57.36
  text "D" at 7681.56,-1065.75 h57.36
  text "www.opalkelly.com" at 548.93,-1107.8 h57.36
  text "(Bottom)" at 1583.81,-1121.94 h57.36
  text "DATE:" at 1610.34,-1211.03 h36.87
  text "SIZE:" at -96.3,-1212.08 h36.87
  text "TIME:" at 942.61,-1212.08 h36.87
  text "ANSI A" at -135.02,-1310.41 h57.36
  text ".Print_Time" at 901.63,-1310.41 h57.36
  text ".PRINT_DATE" at 1579.13,-1310.41 h57.36
  text "FILE NAME:" at 1610.34,-1404.6 h36.87
  text ".PCB_FILE_NAME" at 1578.07,-1501.39 h57.36
  text "4" at 39.3,-1651.77 h57.36
  text "3" at 2293.6,-1651.77 h57.36
  text "2" at 4542.97,-1651.77 h57.36
  text "1" at 6796.98,-1651.77 h57.36

## Dimensions
0,0 to 7086.61,0 on Dimensions
196.85,196.85 to 6889.76,196.85 on MTG Locations
196.85,196.85 to 196.85,3759.84 on MTG Locations
0,3956.69 to 0,0 on Dimensions